# Altium PCB belt_control.PcbDoc
Units mm, origin at the board's own origin, x right, y up, seen from the top; angles counter-clockwise.
Board outline 112.19 x 75.23 mm, 2 copper layers (Top Layer, Bottom Layer); 118 components, 77 nets, 411 pads, 263 vias.
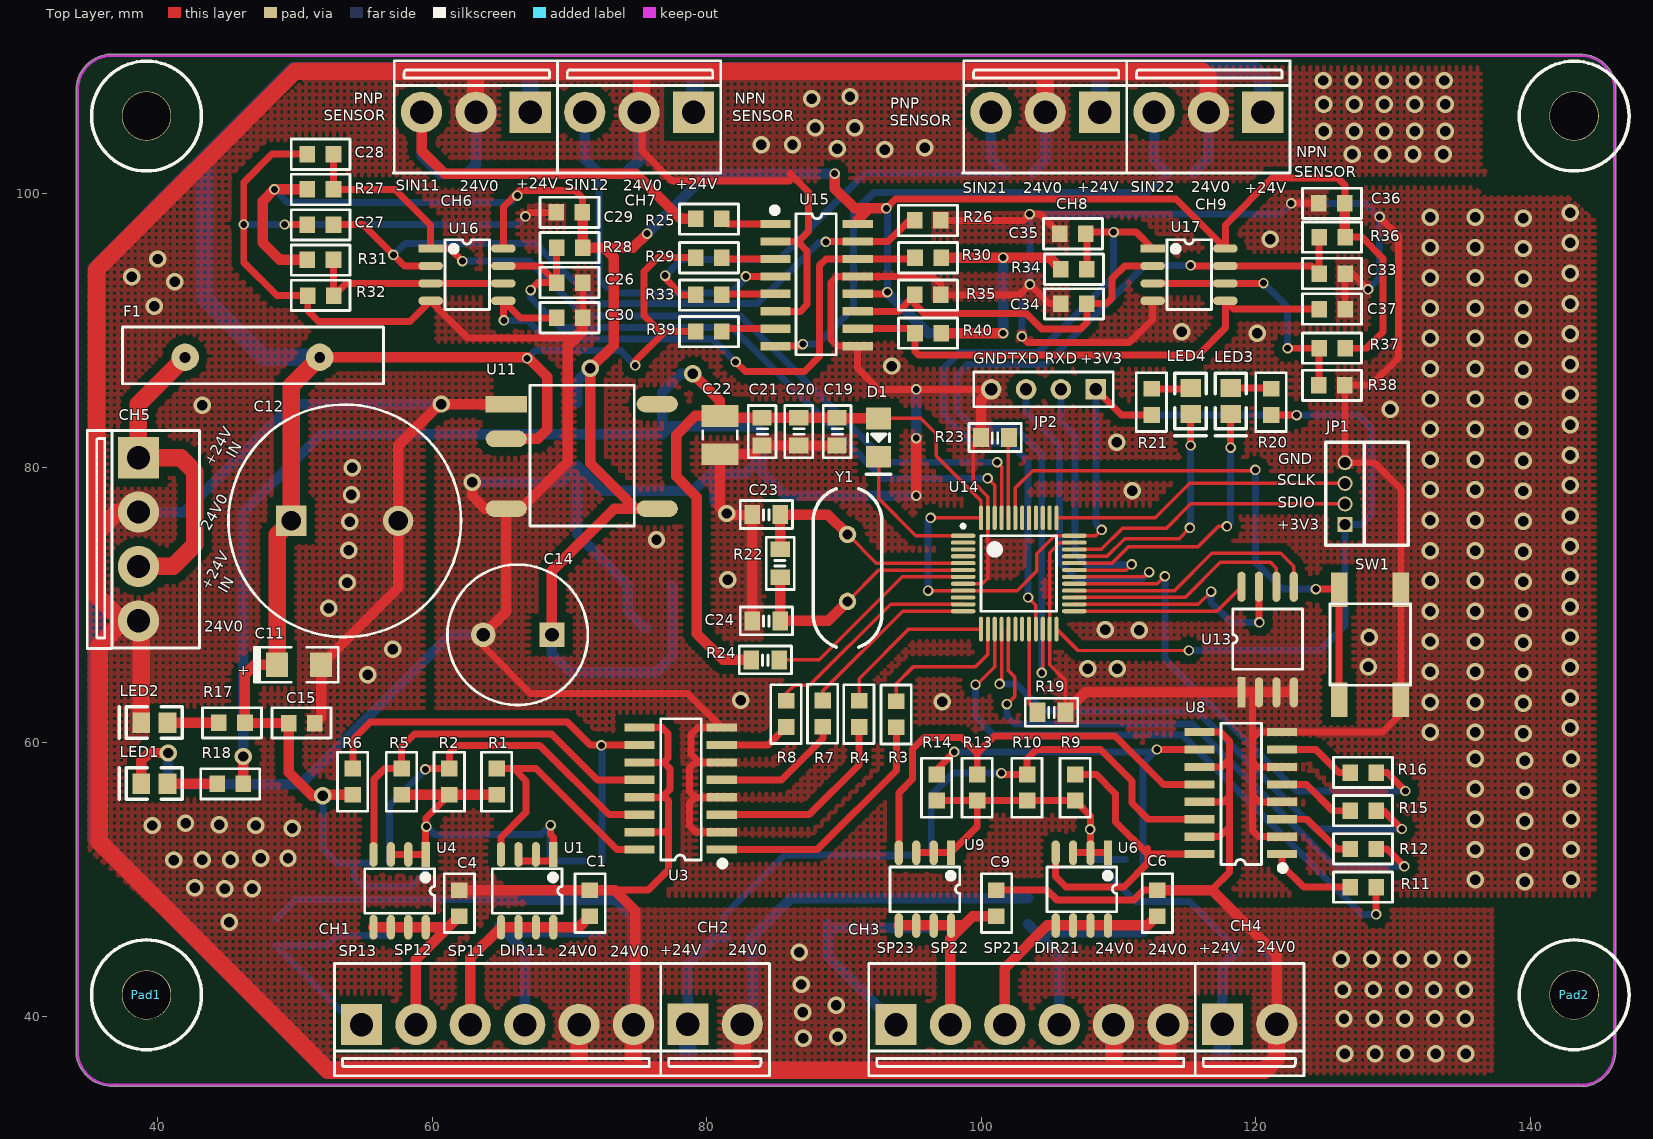
[diagram p0: Top Layer view]
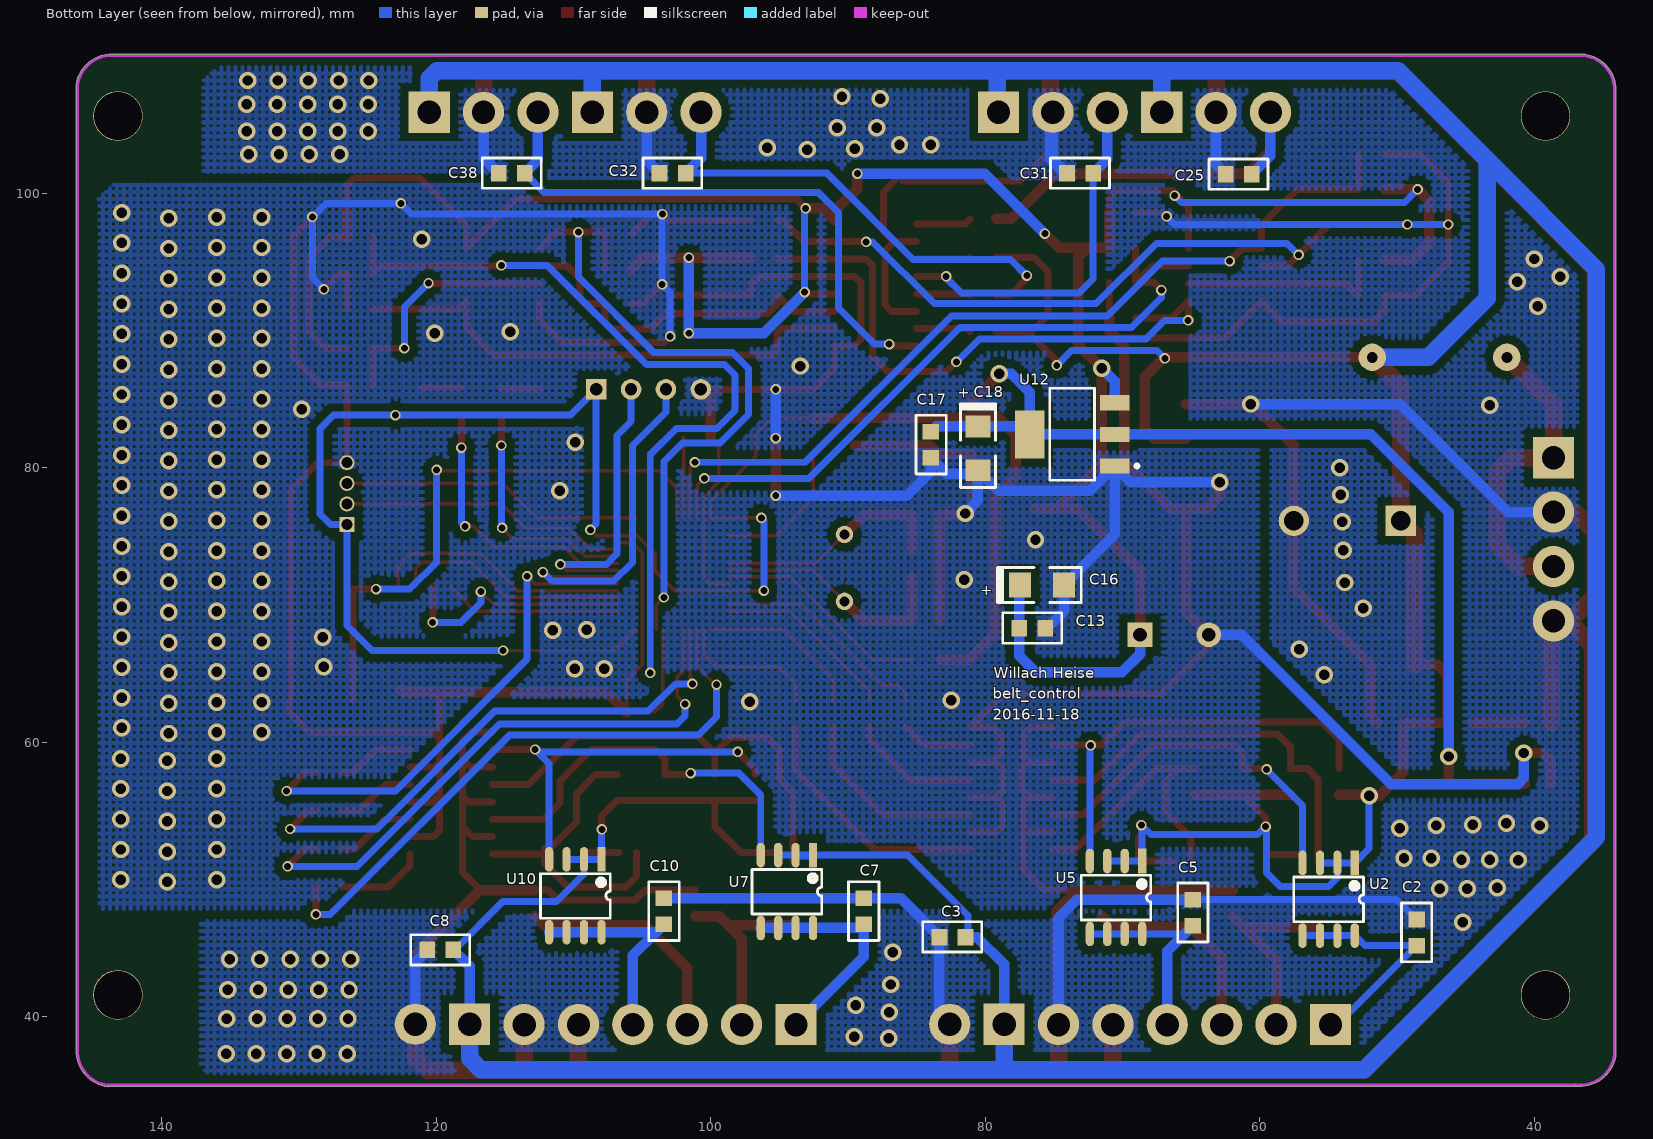
[diagram p1: Bottom Layer view, seen from below]

## Layer stack, top to bottom
Top Solder: solder mask 0.0102, Solder Resist, Dk 3.5
Top Layer: signal copper 0.0356
Dielectric 1: dielectric 0.32, FR-4, Dk 4.8
Bottom Layer: signal copper 0.0356
Bottom Solder: solder mask 0.0102, Solder Resist, Dk 3.5

## Board outline
34.057,37.1 cw(c34.138,37.16) 34.037,37.16 34.037,107.264 cw(c34.138,107.264) 34.047,107.308 cw(c36.678,107.493) 36.301,110.102 cw(c36.368,110.028) 36.368,110.128 143.293,110.128 cw(c143.293,110.028) 143.341,110.115 cw(c143.612,107.493) 146.226,107.836 cw(c146.126,107.823) 146.227,107.823 cw(c146.126,107.823) 146.227,107.823 146.227,37.389 cw(c146.126,37.389) 146.217,37.347 cw(c143.586,37.516) 143.929,34.902 cw(c143.916,35.001) 143.85,34.926 36.728,34.926 cw(c36.728,35.027) 36.7,34.93 cw(c36.652,37.567)

## Design rules (kind name [scope] priority, off if disabled: settings)
Clearance Clearance_1 [InPolygon] p1: gap=0.6
Clearance [All] p2: gap=0.152
ComponentClearance [All] p1: gap=0 collisioncheckmode=3 verticalgap=0 showdistances=FALSE
PolygonConnect [All] p1: connectstyle=Direct reliefconductorwidth=0.254 reliefentries=4 polygonreliefangle="90 Angle" airgapwidth=0.254
RoutingVias [All] p1: holewidth=0.711 width=1.27 viastyle="Through Hole" minholewidth=0.711 minwidth=1.27 maxholewidth=0.711 maxwidth=1.27
SolderMaskExpansion [All] p1: expansion=0.102
Width [All] p1: maxlimit=6 minlimit=0.254 preferedwidth=6
28 further rules are at their usual default settings.

## Classes and differential pairs
component class power_cpu: C11 C12 C13 C14 C15 C16 C17 C18 C19 C20 C21 C22 C23 C24 CH5 D1 F1 JP1 JP2 LED1 LED2 LED3 LED4 Pad2 R17 R18 R19 R20 R21 R22 R23 R24 SW1 U11 U12 U13 U14 Y1
component class senror_input: C25 C26 C27 C28 C29 C30 C31 C32 C33 C34 C35 C36 C37 C38 CH6 CH7 CH8 CH9 R25 R26 R27 R28 R29 R30 R31 R32 R33 R34 R35 R36 R37 R38 R39 R40 U15 U16 U17
component class belt_output: C1 C2 C3 C4 C5 C6 C7 C8 C9 C10 CH1 CH2 CH3 CH4 R1 R2 R3 R4 R5 R6 R7 R8 R9 R10 R11 R12 R13 R14 R15 R16 U1 U2 U3 U4 U5 U6 U7 U8 U9 U10

## Components (designator, comment, footprint, x,y, rotation, side; value= is the part's Value field where it differs from the comment)
C1 "Cap" 0805 71.476,48.26 r90 top
C2 "Cap" 0805 48.565,46.126 r90 bottom
C3 "Cap" 0805 82.372,45.796 r0 bottom
C4 "Cap" 0805 61.951,48.26 r90 top
C5 "Cap" 0805 64.872,47.574 r90 bottom
C6 "Cap" 0805 112.801,48.26 r90 top
C7 "Cap" 0805 88.849,47.676 r90 bottom
C8 "Cap" 0805 119.685,44.856 r0 bottom
C9 "Cap" 0805 101.092,48.26 r90 top
C10 "Cap" 0805 103.403,47.676 r90 bottom
C11 "Cap Pol3" "CAP A-3216" 50.292,65.634 r0 top
C12 "C_2200uF" C7.8*17 49.708,76.124 r0 top
C13 "Cap" 0805 76.556,68.301 r0 bottom
C14 "C_2200uF" C5*10 68.707,67.818 r180 top
C15 "Cap" 0805 50.47,61.392 r180 top
C16 "Cap Pol3" "CAP A-3216" 75.844,71.45 r180 bottom
C17 "Cap" 0805 83.947,81.661 r90 bottom
C18 "Cap Pol3" "CAP A-3216" 80.518,81.407 r270 bottom
C19 "Cap" C0805tan 89.484,82.626 r90 top
C20 "Cap" C0805tan 86.69,82.626 r90 top
C21 "Cap" C0805tan 84.023,82.626 r90 top
C22 "Cap Pol1" 3225[1210] 80.95,82.372 r270 top
C23 "Cap" C0805tan 84.328,76.581 r0 top
C24 "Cap" C0805tan 84.328,68.834 r0 top
C25 "Cap" 0805 61.519,101.371 r0 bottom
C26 "Cap" 0805 70.002,93.472 r180 top
C27 "Cap" 0805 51.841,97.701 r0 top
C28 "Cap" 0805 51.841,102.845 r0 top
C29 "Cap" 0805 69.977,98.603 r0 top
C30 "Cap" 0805 70.002,90.907 r180 top
C31 "Cap" 0805 73.076,101.448 r0 bottom
C32 "Cap" 0805 102.768,101.448 r0 bottom
C33 "Cap" 0805 125.552,94.132 r180 top
C34 "Cap" 0805 106.731,91.948 r0 top
C35 "Cap" 0805 106.655,97.053 r0 top
C36 "Cap" 0805 125.527,99.263 r0 top
C37 "Cap" 0805 125.552,91.542 r180 top
C38 "Cap" 0805 114.478,101.448 r0 bottom
CH1 "HEADER1X6" CH3.96-6PIN 54.839,39.446 r0 top locked
CH2 "HEADER1X2" CH3.96-2PIN 78.613,39.446 r0 top locked
CH3 "HEADER1X6" CH3.96-6PIN 93.777,39.446 r0 top locked
CH4 "HEADER1X2" CH3.96-2PIN 117.551,39.446 r0 top locked
CH5 "HEADER1X4" CH3.96-4PIN 38.583,80.721 r270 top
CH6 "HEADER1X3" CH3.96-3PIN 67.132,105.893 r180 top
CH7 "HEADER1X3" CH3.96-3PIN 79.019,105.893 r180 top
CH8 "HEADER1X3" CH3.96-3PIN 108.61,105.893 r180 top
CH9 "HEADER1X3" CH3.96-3PIN 120.498,105.893 r180 top
D1 "Diode 1N4148" LL34 92.507,83.591 r270 top
F1 "X30_UF500" X30UF600 41.986,88.062 r0 top
JP1 "4 HEADER" CON4_1.5 126.492,78.105 r90 top
JP2 "4 HEADER" HDR1X4 108.331,85.7 r180 top
LED1 "" LED-0805 40.691,56.972 r180 top
LED2 "" LED-0805 40.691,61.417 r180 top
LED3 "" LED-0805 118.161,85.81 r270 top
LED4 "" LED-0805 115.24,85.81 r270 top
Pad1 "Pad" pad35 39.141,41.589 r0 top
Pad2 "Pad" pad35 143.159,41.589 r0 top
Pad3 "Pad" pad35 143.159,105.613 r0 top locked
Pad4 "Pad" pad35 39.141,105.613 r0 top locked
R1 "Res2" 0805 64.694,57.125 r270 top
R2 "Res2" 0805 61.239,57.125 r270 top
R3 "Res2" 0805 93.802,62.027 r270 top
R4 "Res2" 0805 91.084,62.052 r270 top
R5 "Res2" 0805 57.76,57.125 r270 top
R6 "Res2" 0805 54.204,57.125 r270 top
R7 "Res2" 0805 88.443,62.078 r270 top
R8 "Res2" 0805 85.776,62.052 r270 top
R9 "Res2" 0805 106.832,56.693 r270 top
R10 "Res2" 0805 103.327,56.693 r270 top
R11 "Res2" 0805 127.813,49.428 r180 top
R12 "Res2" 0805 127.813,52.214 r180 top
R13 "Res2" 0805 99.695,56.693 r270 top
R14 "Res2" 0805 96.749,56.693 r270 top
R15 "Res2" 0805 127.813,54.999 r180 top
R16 "Res2" 0805 127.813,57.785 r180 top
R17 "Res2" 0805 45.39,61.417 r0 top
R18 "Res2" 0805 45.263,56.972 r0 top
R19 "Res2" C0805tan 105.105,62.179 r0 top
R20 "Res2" 0805 121.107,84.785 r270 top
R21 "Res2" 0805 112.395,84.785 r270 top
R22 "Res2" C0805tan 85.344,73.025 r270 top
R23 "Res2" C0805tan 100.99,82.194 r0 top
R24 "Res2" C0805tan 84.252,65.989 r0 top
R25 "Res2" 0805 80.137,98.12 r0 top
R26 "Res2" 0805 96.088,98.019 r0 top
R27 "Res2" 0805 51.841,100.273 r0 top
R28 "Res2" 0805 70.002,96.012 r180 top
R29 "Res2" 0805 80.137,95.301 r0 top
R30 "Res2" 0805 96.114,95.275 r180 top
R31 "Res2" 0805 51.841,95.129 r0 top
R32 "Res2" 0805 51.867,92.532 r180 top
R33 "Res2" 0805 80.137,92.583 r0 top
R34 "Res2" 0805 106.731,94.463 r0 top
R35 "Res2" 0805 96.088,92.583 r0 top
R36 "Res2" 0805 125.552,96.774 r180 top
R37 "Res2" 0805 125.552,88.697 r180 top
R38 "Res2" 0805 125.527,86.004 r0 top
R39 "Res2" 0805 80.137,89.916 r0 top
R40 "Res2" 0805 96.114,89.789 r180 top
SW1 "SW-KEY-2" KEY_SOP4 126.06,63.094 r90 top
U1 "CEM4435A" SOP8-OP27 68.809,51.765 r270 top
U2 "CEM4435A" SOP8-OP27 53.061,51.156 r270 bottom
U3 "TLP280-4" SO16 78.08,56.617 r180 top
U4 "CEM4435A" SOP8-OP27 59.512,51.765 r270 top
U5 "CEM4435A" SOP8-OP27 68.555,51.283 r270 bottom
U6 "CEM4435A" SOP8-OP27 109.22,51.892 r270 top
U7 "CEM4435A" SOP8-OP27 92.532,51.714 r270 bottom
U8 "TLP280-4" SO16 118.897,56.286 r180 top
U9 "CEM4435A" SOP8-OP27 97.79,51.892 r270 top
U10 "CEM4435A" SOP8-OP27 107.95,51.41 r270 bottom
U11 "B2405XT-2WR2" B2405XT-2WR2 65.38,84.633 r0 top
U12 "AMS1117-3.3" SOT223 73.66,82.423 r90 bottom
U13 "switch2X4" SOP8_switch 118.948,63.627 r90 top
U14 "STM32F103C8T6" LQFP48 102.718,72.288 r0 top
U15 "TLP280-4" SO16 87.986,93.294 r0 top
U16 "LM293" SOP8-OP27 59.919,95.961 r0 top
U17 "LM293" SOP8-OP27 112.522,95.961 r0 top
Y1 "8MHz" XTAL_US 90.246,75.133 r270 top

## Footprints (in the part's own frame and the unit in brackets; to place one, negate y for a bottom-side part, rotate by r counter-clockwise, add the part's x,y. Pads: shape width x height; smd on the part's side, far side on the other; paste and mask are expansions set on the pad)
0805 [mm] "1.14mm,1.2mm,3.05mm"
  rect 1.14x1.2 smd: 1(-0.95,0) 2(0.95,0)
  silkscreen extent -2.13,-1.12 2.16,1.09
3225[1210] [mm] "Chip Resistor; Body 3.2 x 2.5 mm (LxW typ)"
  rect 1.6x2.7 smd: 1(-1.4,0) 2(1.4,0)
  silkscreen extent -0.3,-1.25 0.3,1.25
B2405XT-2WR2 [mm]
  rect 3x1.2 smd: 1(0,0)
  oval 3x1.2 smd: 2(0,-2.54) 4(0,-7.62) 5(11,-7.62) 8(11,0)
  silkscreen extent 1.73,-8.89 9.32,1.37
C5*10 [mm]
  rect 1.8x1.8 hole 1: 1(0,0)
  round 1.8 hole 1: 2(5,0)
  silkscreen extent -2.62,-5.11 7.62,5.11
C7.8*17 [mm]
  rect 2.2x2.2 hole 1.4: 1(0,0)
  round 2.2 hole 1.4: 2(7.8,0)
  silkscreen extent -4.57,-8.47 12.37,8.47
C0805tan [mil]
  rect 45x55 smd: 1(-40,0) 2(40,0)
  silkscreen extent -75,-40 75,40
"CAP A-3216" [mm]
  rect 1.6x1.8 smd: 1(-1.6,0) 2(1.6,0)
  silkscreen extent -3.25,-1.27 2.85,1.27
CH3.96-2PIN [mm]
  rect 3x3 hole 1.7: 1(0,0)
  round 3 hole 1.7: 2(3.96,0)
  silkscreen extent -1.98,-3.76 5.94,4.42
CH3.96-3PIN [mm]
  rect 3x3 hole 1.7: 1(0,0)
  round 3 hole 1.7: 2(3.96,0) 3(7.92,0)
  silkscreen extent -1.98,-3.76 9.98,4.42
CH3.96-4PIN [mm]
  rect 3x3 hole 1.7: 1(0,0)
  round 3 hole 1.7: 2(3.96,0) 3(7.92,0) 4(11.887,0)
  silkscreen extent -1.98,-3.73 13.89,4.45
CH3.96-6PIN [mm]
  rect 3x3 hole 1.7: 1(0,-0.025)
  round 3 hole 1.7: 2(3.96,-0.025) 3(7.92,-0.025) 4(11.887,-0.025) 5(15.847,-0.025) 6(19.807,-0.025)
  silkscreen extent -1.98,-3.76 21.79,4.42
CON4_1.5 [mm]
  rect 1.1x1.1 hole 0.8: 1(-2.25,0)
  round 1.1 hole 0.8: 2(-0.75,0) 3(0.75,0) 4(2.25,0)
  silkscreen extent -3.75,-4.6 3.75,1.4
HDR1X4 [mm] "Connector; Header; 4 Position"
  rect 1.5x1.5 hole 0.9: 1(0,0)
  round 1.5 hole 0.9: 2(2.54,0) 3(5.08,0) 4(7.62,0)
  silkscreen extent -1.27,-1.27 8.89,1.27
KEY_SOP4 [mm]
  rect 2.5x1.2 smd: 1(0,0) 1(8,0) 2(0,-4.5) 2(8,-4.5)
  silkscreen extent 1.04,-5.21 6.98,0.66
LED-0805 [mm]
  rect 1.3x1.5 smd: 1(0,0) 2(1.9,0)
  silkscreen extent -1.08,-1.14 3.49,1.14
LL34 [mm]
  rect 1.6x1.8 smd: 1(0,0) 2(2.8,0)
  silkscreen extent 1.1,-0.89 4.07,0.89
LQFP48 [mm]
  oval 1.8x0.3 smd: 1(-4.05,2.75) 2(-4.05,2.25) 3(-4.05,1.75) 4(-4.05,1.25) 5(-4.05,0.75) 6(-4.05,0.25) 7(-4.05,-0.25) 8(-4.05,-0.75) 9(-4.05,-1.25) 10(-4.05,-1.75) 11(-4.05,-2.25) 12(-4.05,-2.75) 25(4.05,-2.75) 26(4.05,-2.25) 27(4.05,-1.75) 28(4.05,-1.25) 29(4.05,-0.75) 30(4.05,-0.25) 31(4.05,0.25) 32(4.05,0.75) 33(4.05,1.25) 34(4.05,1.75) 35(4.05,2.25) 36(4.05,2.75)
  oval 0.3x1.8 smd: 13(-2.75,-4.05) 14(-2.25,-4.05) 15(-1.75,-4.05) 16(-1.25,-4.05) 17(-0.75,-4.05) 18(-0.25,-4.05) 19(0.25,-4.05) 20(0.75,-4.05) 21(1.25,-4.05) 22(1.75,-4.05) 23(2.25,-4.05) 24(2.75,-4.05) 37(2.75,4.05) 38(2.25,4.05) 39(1.75,4.05) 40(1.25,4.05) 41(0.75,4.05) 42(0.25,4.05) 43(-0.25,4.05) 44(-0.75,4.05) 45(-1.25,4.05) 46(-1.75,4.05) 47(-2.25,4.05) 48(-2.75,4.05)
  silkscreen extent -4.17,-2.75 2.75,3.57, body extent -3.5,-3.5 3.5,3.5, height 1.6
pad35 [mm]
  round 3.6 hole 3.5: 1(0.025,0)
  silkscreen extent -3.97,-4 4.03,4
SO16 [mm] "Wide = 6mm"
  rect 2.2x0.6 smd: 1(-3,4.445) 2(-3,3.175) 3(-3,1.905) 4(-3,0.635) 5(-3,-0.635) 6(-3,-1.905) 7(-3,-3.175) 8(-3,-4.445) 9(3,-4.445) 10(3,-3.175) 11(3,-1.905) 12(3,-0.635) 13(3,0.635) 14(3,1.905) 15(3,3.175) 16(3,4.445)
  silkscreen extent -3.23,-5.08 1.45,5.64
SOP8-OP27 [mm]
  rect 1.8x0.6 smd: 1(-0.051,0)
  oval 1.8x0.6 smd: 2(-0.051,-1.27) 3(-0.051,-2.54) 4(-0.051,-3.81) 5(5.251,-3.81) 6(5.251,-2.54) 7(5.251,-1.27) 8(5.251,0)
  silkscreen extent 0.99,-4.44 4.24,0.64
SOP8_switch [mm]
  rect 2.2x0.6 smd: 1(0,0)
  oval 2.2x0.6 smd: 2(0,-1.27) 3(0,-2.54) 4(0,-3.81) 5(7.695,-3.81) 6(7.695,-2.54) 7(7.695,-1.27) 8(7.695,0)
  silkscreen extent 1.68,-4.44 6.06,0.64
SOT223 [mm] "SOT-223/SC-73; 4 Leads; Body 6.7 x 7.3 mm, inc. leads (LxW max)"
  rect 1.1x2.15 smd: 1(-2.3,-3.1) 2(0,-3.1) 3(2.3,-3.1)
  rect 3.5x2.15 smd: 4(0,3.1)
  silkscreen extent -3.35,-4.85 3.35,1.63
X30UF600 [mm]
  round 2 hole 0.8: 1(0,-0.025) 2(9.804,-0.025)
  silkscreen extent -4.57,-1.96 14.45,2.18
XTAL_US [mil]
  round 50 hole 28: 1(0,0) 2(192.13,0)
  silkscreen extent -131,-98 323,98

## Part data
C1 C2 C3 C4 C5 C6 C7 C8 C9 C10 C13 C15 C17 C19 C20 C21 C23 C24 C25 C26 C27 C28 C29 C30 C31 C32 C33 C34 C35 C36 C37 C38: "Capacitor"
C11 C16 C18: "Polarized Capacitor (Surface Mount)"
C22: "Polarized Capacitor (Radial)"
D1: "High Conductance Fast Diode"
F1: library part "Fuse 1", "Fuse"
JP1 JP2: "4 Pin Header"
LED1 LED2 LED3 LED4: library part LED2, "Typical RED, GREEN, YELLOW, AMBER GaAs LED"
R1 R2 R3 R4 R5 R6 R7 R8 R9 R10 R11 R12 R13 R14 R15 R16 R17 R18 R19 R20 R21 R22 R23 R24 R25 R26 R27 R28 R29 R30 R31 R32 R33 R34 R35 R36 R37 R38 R39 R40: "Resistor"
U3 U8 U15: library part TLP521-4
U12: library part AMS1117-5
Y1: library part XTAL, "Crystal Oscillator"

## Via types
v1: diameter 1.27, hole 0.762, Top Layer to Bottom Layer, 193 vias
v2: diameter 0.762, hole 0.508, Top Layer to Bottom Layer, 70 vias

## Nets (pads, with @x,y where several pads share a name; then routed paths per layer and width w, separated by ;. In a path a pad name is that pad's centre, name@x,y a point inside that pad or via, vN(x,y) a via of type N, cw(c..) or ccw(c..) an arc to the next point about the centre after c; other vN are vias at no path point)
24V0: C1.2 C2.2 C3.2 C4.2 C5.2 C6.2 C7.2 C8.2 C9.2 C10.2 C11.2 C12.2 C15.1 C25.2 C31.2 C32.2 C38.2 CH1.5 CH1.6 CH2.2 CH3.5 CH3.6 CH4.2 CH5.2 CH5.4 CH6.2 CH7.2 CH8.2 CH9.2 LED2.2 U3.9 U3.11 U3.13 U3.15 U8.9 U8.11 U8.13 U8.15 U11.1 U15.2 U15.6 | length 552.9
  Top Layer w0.508: 73.279,49.21 75.702,49.21 77.216,50.724 77.216,55.702 76.937,55.982 76.733,55.982 ; U3.15 76.937,53.442 77.191,53.696 ; U3.13 76.733,55.982 ; U3.11 76.835,58.522 ; U3.9 76.733,61.062 77.165,60.63 77.165,58.852 76.835,58.522 ; CH7.2@75.263,105.893 75.263,103.096 77.47,100.889 86.03,100.889 ; U15.6 86.817,91.389 87.3,91.872 87.3,95.783 86.614,96.469 ; U15.2 86.614,96.469 ; 86.055,101.422 87.401,100.076 87.401,97.206 86.665,96.469 86.614,96.469 ; C9.2 104.79,49.21 105.486,48.514 111.1,48.514 111.796,49.21 C6.2 ; U8.15 117.348,53.111 118.059,53.823 ; U8.13 117.627,55.651 118.059,56.083 ; U8.11 117.475,58.191 118.059,58.776 ; U8.9 117.399,60.731 118.059,60.071 118.059,58.776 ; 116.464,49.266 116.804,49.266 118.059,50.521 118.059,53.823 ; 76.733,55.982 77.292,56.54 77.292,58.09 76.86,58.522 76.835,58.522 ; 118.059,53.823 118.059,56.083 ; 118.059,56.083 118.059,58.776
  Top Layer w0.762: C15.1 51.892,61.864 C11.2 57.508,71.249 C12.2 57.508,81.612 60.528,84.633 v1(60.655,84.633) U11.1 ; C4.2 C1.2 73.279,49.21 74.773,47.716 74.773,36.754 ; C6.2 116.804,49.21 121.511,44.503 CH4.2
  Top Layer w1.27: CH5.2 37.01,76.761 35.535,75.286 ; LED2.2 38.791,68.626 CH5.4 CH5.4@37.516,68.834 ; CH6.2 63.172,108.714 ; CH1.5 70.686,36.096 70.688,36.093 ; CH1.6 74.646,36.241 74.498,36.093 ; CH7.2@75.263,105.893 75.263,108.765 75.387,108.89 ; CH2.2 82.573,36.167 82.499,36.093 ; CH8.2 104.65,108.887 104.648,108.89 ; CH3.5 109.624,36.193 109.525,36.093 ; CH3.6 113.584,36.139 113.538,36.093 ; CH9.2 116.538,108.456 116.103,108.89 104.648,108.89 ; CH4.2 121.511,36.98 120.625,36.093 113.538,36.093 ; 35.535,75.286 35.535,94.437 49.987,108.89 75.387,108.89 ; 35.535,75.286 35.535,70.714 37.414,68.834 CH5.4@37.516,68.834 ; CH5.4@37.516,68.834 35.712,67.031 35.712,52.756 52.375,36.093 70.688,36.093 ; 70.688,36.093 74.498,36.093 ; 74.498,36.093 82.499,36.093 ; 75.387,108.89 104.648,108.89 ; 82.499,36.093 109.525,36.093 ; 109.525,36.093 113.538,36.093
  Bottom Layer w0.508: C2.2 50.013,48.524 C5.2
  Bottom Layer w0.762: CH5.2 41.887,76.761 49.759,84.633 v1(60.655,84.633) ; C25.2 63.172,102.075 ; C5.2 73.33,48.524 74.646,47.208 CH1.6 ; C31.2@74.026,101.27 75.263,102.507 75.263,102.532 ; CH7.2 75.059,102.481 C31.2 74.178,101.448 75.263,102.532 ; CH7.2@75.263,105.893 75.263,102.532 ; CH2.2 83.322,40.195 C3.2 86.152,48.626 89.484,48.626 C10.2 ; C3.2@83.144,45.654 86.04,48.55 ; C32.2 104.65,102.38 CH8.2 ; C38.2 116.538,102.557 CH9.2 ; C8.2 121.511,43.98 CH4.2 ; 63.172,102.075 63.198,102.1 63.198,105.867 CH6.2 63.172,102.075
  other v1: 126.467,37.287 128.675,37.287 130.883,37.287 133.092,37.287 135.3,37.287 87.02,38.43 89.535,38.532 126.416,39.853 128.624,39.853 130.832,39.853 133.041,39.853 135.249,39.853 86.995,40.31 89.433,40.818 126.34,41.961 128.548,41.961 130.756,41.961 132.965,41.961 135.173,41.961 86.868,42.342 126.213,44.196 128.421,44.196 130.629,44.196 132.838,44.196 135.046,44.196 86.716,44.704 45.212,46.863 44.882,49.327 46.863,49.327 42.672,49.403 41.148,51.41 43.231,51.435 45.288,51.435 47.498,51.537 49.479,51.537 49.784,53.721 39.599,53.924 47.117,53.924 44.475,53.975 42.012,54.077 55.296,64.897 57.125,66.777 52.451,69.748 53.797,71.628 53.899,73.99 53.975,76.048 54.102,78.029 54.153,79.985 43.231,84.557 39.726,91.77 41.224,93.548 38.1,93.904 39.98,95.199 127.025,102.845 129.234,102.845 131.442,102.845 133.65,102.845 92.964,103.175 89.484,103.226 95.885,103.302 83.972,103.53 86.233,103.53 124.943,104.521 127.151,104.521 129.359,104.521 131.568,104.521 133.776,104.521 87.884,104.75 90.78,104.75 124.943,106.477 127.151,106.477 129.359,106.477 131.568,106.477 133.776,106.477 87.63,106.883 90.424,107.036 124.892,108.204 127.1,108.204 129.308,108.204 131.517,108.204 133.725,108.204
+3.3V: C17.2 C18.1 C19.2 C20.2 C21.2 C22.1 D1.1 JP1.1 JP2.1 R18.2 R20.2 R21.2 R24.1 U12.2 U12.4 U14.9 U14.24 U14.36 U14.48 | length 218.5
  Top Layer w0.254: D1.1 95.58,83.591 96.698,82.474 96.698,80.848 99.968,77.578 U14.48 v2(96.305,76.338) v2@96.266,76.378 ; v2@96.114,71.044 v2(96.119,71.038) U14.9 102.611,71.038 104.038,72.466 104.038,73.736 105.341,75.038 U14.36 108.312,75.038 108.763,75.489 v2(108.763,75.463) ; U14.24 107.031,66.675 v2(115.113,66.675) v2@115.138,66.65
  Top Layer w0.508: JP2.1 110.195,83.835 R21.2 ; R20.2 121.122,83.82 v2(122.961,83.82)
  Top Layer w0.762: R18.2 46.213,58.938 v1(46.228,58.953) ; v1(78.969,86.843) 80.95,84.861 C22.1 ; R24.1 81.178,65.989 79.273,67.894 79.273,77.851 77.749,79.375 77.749,82.372 79.149,83.772 C22.1 ; D1.1 89.535,83.591 C19.2 C20.2 C21.2 81.08,83.642 C22.1
  Bottom Layer w0.508: v2(96.119,71.038) 96.119,76.152 v2(96.305,76.338) ; v2(108.763,75.463) 108.331,75.895 JP2.1 110.211,83.82 v2(122.961,83.82) 127.457,83.82 128.448,82.829 128.448,76.606 127.696,75.855 JP1.1 126.492,68.504 124.663,66.675 v2(115.113,66.675)
  Bottom Layer w0.762: v1(46.228,58.953) 46.228,76.759 51.892,82.423 U12.2 U12.4 ; v1(78.969,86.843) 78.105,86.843 76.76,85.498 U12.4 ; C17.2 83.551,83.007 C18.1 77.344,83.007 U12.4
+5V: C13.2 C14.1 C16.1 C29.2 C36.2 R27.1 R28.1 R30.1 R31.1 R34.1 R36.1 R37.1 R40.1 U11.5 U12.3 U15.12 U15.16 U16.8 U17.8 | length 215.6
  Top Layer w0.508: U16.8 65.169,99.002 66.345,100.178 70.383,100.178 70.927,99.634 C29.2 ; U15.12 93.015,92.659 v2(93.142,92.786) ; v2(93.066,98.882) 93.751,99.568 114.166,99.568 U17.8 117.773,97.681 121.183,101.092 125.959,101.092 126.477,100.574 C36.2 ; R36.1@126.477,96.799 127.711,96.799 129.261,95.25 129.261,89.891 128.067,88.697 R37.1
  Top Layer w0.762: R31.1 48.863,95.129 47.625,96.368 47.625,99.416 v2(48.482,100.273) R27.1 ; C14.1 68.707,72.466 73.254,77.013 74.803,77.013 ; C29.2 70.952,98.577 R28.1 72.517,96.012 ; v2(75.641,97.053) 74.6,96.012 72.517,96.012 ; U11.5 74.803,77.013 ; v2(89.306,101.422) 89.306,100.33 90.754,98.882 91.824,98.882 ; 90.986,98.044 91.824,98.882 ; v2(93.066,98.882) 91.824,98.882 ; R40.1 v2(101.575,89.789) ; R30.1 104.968,95.275 R34.1 ; R36.1@126.477,96.799 C36.2 ; 72.517,96.012 73.203,95.326 73.203,88.925 v1(71.501,87.224) 71.501,80.315 74.803,77.013
  Bottom Layer w0.508: v2(48.482,100.273) 49.441,99.314 65.684,99.314 v2(66.192,99.822) ; v2(93.066,98.882) 93.066,98.933 93.142,98.857 v2(93.142,92.786)
  Bottom Layer w0.762: C14.1 68.707,66.421 70.028,65.1 76.327,65.1 77.506,66.279 C13.2 77.506,71.389 C16.1 ; U12.3 70.56,86.283 v1(71.501,87.224) ; v2(75.641,97.053) 80.01,101.422 v2(89.306,101.422) ; v2(93.142,92.786) 96.139,89.789 v2(101.575,89.789) v2(101.575,95.301)
+24V: C3.1 C8.1 C11.1 C12.1 C15.2 CH2.1 CH4.1 CH6.1 CH7.1 CH8.1 CH9.1 F1.2 R1.2 R2.2 R5.2 R6.2 R9.2 R10.2 R13.2 R14.2 R17.2 R29.1 R39.1 U1.1 U1.2 U1.3 U2.1 U2.2 U2.3 U4.1 U4.2 U4.3 U5.1 U5.2 U5.3 U6.1 U6.2 U6.3 U7.1 U7.2 U7.3 U9.1 U9.2 U9.3 U10.1 U10.2 U10.3 U11.2 | length 476
  Top Layer w0.508: U4.3 U4.2 U4.1 v2@59.512,53.823 ; v2@59.538,53.848 59.538,54.473 R2.2 ; U1.3@66.269,51.333 68.809,51.333 U1.1 68.809,53.061 68.605,53.264 v2(68.605,53.95) ; v2(74.778,87.452) 74.778,87.757 76.937,89.916 ; R39.1 76.581,89.916 75.413,91.084 75.413,94.285 76.429,95.301 R29.1 ; U9.3 U9.2 U9.1 99.695,53.848 R13.2 ; R14.2 R13.2 ; U6.3 U6.2 ; U6.1 U6.2 ; R13.2 R10.2 R9.2 107.95,54.625 U6.2
  Top Layer w0.762: C11.1 47.066,65.634 46.34,64.907 R17.2 46.365,61.392 C15.2 49.52,57.821 51.232,56.109 v1(52.019,56.109) 52.085,56.175 R6.2 ; F1.2 66.929,88.036 68.351,86.614 68.351,82.779 67.666,82.093 U11.2 ; R5.2 R2.2 R1.2
  Top Layer w1.27: C11.1 48.692,75.108 C12.1 49.708,85.954 F1.2
  Bottom Layer w0.508: v1(52.019,56.109) 52.019,52.248 U2.1 U2.2 ; U2.3 U2.2 ; v2(66.904,87.96) 67.462,88.519 73.711,88.519 v2(74.778,87.452) ; v2(68.605,53.95) v2@68.555,53.899 ; U5.3 U5.2 U5.1 v2@68.555,53.899 ; C3.1@81.244,45.796 81.244,47.361 85.649,51.765 U7.1 U7.2 U7.3 ; U7.1@92.532,51.714 U7.2@93.802,51.714 ; v2(107.925,53.645) 107.95,53.619 U10.1 U10.2 ; U10.3 U10.2 ; C8.1@118.633,44.892 115.138,48.387 111.227,48.387 109.22,50.394 U10.2 ; U2.2 54.331,50.14 54.991,49.479 58.496,49.479 59.512,50.495 59.512,53.797 v2(59.563,53.848) 60.147,53.264 67.92,53.264 v2@68.555,53.899
  Bottom Layer w0.762: CH2.1 78.613,43.815 80.594,45.796 81.244,45.796 C3.1 ; CH4.1 117.551,43.673 C8.1
  Bottom Layer w1.27: F1.2 47.727,88.036 43.409,92.354 43.409,102.413 ; CH6.1 67.132,108.839 ; CH2.1 78.613,36.246 78.511,36.144 ; CH7.1 79.121,105.994 79.121,108.915 ; CH8.1 108.61,108.915 ; CH4.1 117.551,36.957 116.738,36.144 78.511,36.144 ; CH9.1 120.498,108.356 119.939,108.915 108.61,108.915 ; 43.409,102.413 35.458,94.463 35.458,53.061 52.375,36.144 78.511,36.144 ; 43.409,102.413 49.911,108.915 79.121,108.915 ; 79.121,108.915 108.61,108.915
+24V_IN: CH5.1 CH5.3 F1.1 | length 23.3
  Top Layer w1.27: CH5.3 41.102,72.801 42.672,74.371 42.672,79.705 41.656,80.721 CH5.1 38.583,84.633 F1.1
DIR11: C5.1 CH1.4 U5.5 U5.6 U5.7 U5.8 | length 14.9
  Bottom Layer w0.508: 65.464,46.032 U5.8 U5.7 U5.6 U5.5
  Bottom Layer w0.762: C5.1 65.464,46.032 66.726,44.77 CH1.4
DIR21: C10.1 CH3.4 U10.5 U10.6 U10.7 U10.8 | length 16
  Bottom Layer w0.762: C10.1 C10.1@103.97,46.159 ; CH3.4 105.664,44.465 C10.1@103.97,46.159 ; U10.5 U10.6 U10.7 U10.8 C10.1@103.97,46.159
GND: C13.1 C14.2 C16.2 C17.1 C18.2 C19.1 C20.1 C21.1 C22.2 C23.1 C24.1 C26.1 C27.1 C28.1 C29.1 C30.1 C33.1 C34.1 C35.1 C36.1 C37.1 JP1.4 JP2.4 LED1.2 R19.2 R23.1 R26.2 R32.2 R35.2 R38.2 SW1.2 U3.2 U3.4 U3.6 U3.8 U8.2 U8.4 U8.6 U8.8 U11.4 U12.1 U13.1 U13.2 U13.3 U13.4 U14.8 U14.23 U14.35 U14.47 U15.9 U15.13 U16.4 U17.4 | length 477.5
  Top Layer w0.254: U14.8 100.063,71.538 100.468,71.943 U14.47 100.468,77.891 99.39,78.969 99.39,81.61 R23.1 ; R19.2 106.121,64.491 104.968,65.644 U14.23 104.968,73.802 105.704,74.538 U14.35
  Top Layer w0.508: v2(49.225,97.714) 49.238,97.701 C27.1 ; C28.1 48.311,102.845 46.253,100.787 v2(46.253,97.714) 46.253,94.945 48.666,92.532 R32.2 50.917,91.45 51.714,90.653 58.369,90.653 U16.4 62.56,89.459 70.46,89.459 ; C14.2 63.707,67.001 67.158,63.551 78.59,63.551 U3.8 79.35,61.062 ; v2(66.777,98.298) 67.081,98.603 C29.1 ; C30.1 C26.1 ; 79.324,61.062 79.35,61.062 ; U3.2 79.197,53.442 78.715,53.924 78.715,55.55 79.146,55.982 ; U3.4 79.146,55.982 ; U3.6 79.451,58.522 ; R26.2 103.048,98.019 v2(103.505,98.476) 104.282,98.476 C35.1 ; JP2.4 92.507,85.7 90.986,87.221 U15.9 89.535,88.849 89.052,89.332 89.052,93.472 89.51,93.929 U15.13 96.444,93.929 97.038,93.335 R35.2 102.768,92.583 v2(103.53,93.345) 104.927,91.948 C34.1 ; v2(102.946,89.56) 102.946,89.51 103.353,89.103 110.769,89.103 112.471,90.805 U17.4 ; U13.2 119.736,63.144 119.736,60.249 ; U8.2 120.193,53.111 119.736,53.569 119.736,56.159 ; U8.4 120.244,55.651 119.736,56.159 ; U8.6 120.117,58.191 119.736,58.572 ; v2@122.555,99.238 v2(122.568,99.251) 122.58,99.263 C36.1 ; C37.1 C33.1 127.025,94.132 v2(128.168,92.989) ; v2(129.007,98.273) 130.378,96.901 130.378,87.986 128.397,86.004 R38.2 126.477,80.37 JP1.4 128.636,80.355 130.56,78.431 130.56,71.094 SW1.2@130.56,63.094 ; SW1.2@130.687,62.967 130.687,62.205 129.214,60.731 U8.8 120.218,60.731 119.736,60.249 ; 79.146,55.982 78.74,56.388 78.74,58.115 79.146,58.522 79.451,58.522 ; 79.35,61.062 78.842,60.554 78.842,59.131 79.451,58.522 ; 119.736,56.159 119.736,58.572 ; 119.736,58.572 119.736,60.249
  Top Layer w0.762: LED1.2 38.791,58.628 39.37,59.207 v1(40.742,59.207) ; v1(62.89,78.943) 62.89,77.953 63.83,77.013 U11.4 ; C14.2 65.38,69.491 U11.4 ; C30.1 70.952,89.952 70.46,89.459 69.875,88.875 69.875,80.442 66.446,77.013 U11.4 ; v1@80.95,77.064 C22.2 83.385,80.972 C21.1 C20.1 C19.1 ; v1@81.432,76.581 C23.1 C24.1 ; v2(95.25,77.953) v2(95.25,82.144) ; R23.1 99.974,84.963 JP2.4 ; R19.2 107.569,63.627 U13.1 U13.2 U13.3 122.352,63.627 U13.4@122.555,63.83
  Bottom Layer w0.508: v2(46.253,97.714) v2(49.225,97.714) 66.192,97.714 v2(66.777,98.298) ; v2(102.946,89.56) 102.946,92.761 v2(103.53,93.345) 103.53,98.45 v2(103.505,98.476) 121.793,98.476 v2(122.568,99.251) 128.029,99.251 v2(129.007,98.273) 129.007,93.828 v2(128.168,92.989)
  Bottom Layer w0.762: v1(40.742,59.207) 40.742,57.404 41.199,56.947 50.419,56.947 61.29,67.818 C14.2 ; v1(62.89,78.943) 69.38,78.943 U12.1 ; C13.1 75.489,68.301 74.244,69.545 C16.2 70.56,75.135 U12.1 ; v1(81.432,76.657) 80.518,77.572 C18.2 ; v2@95.199,85.75 v2(95.25,85.7) v2(95.25,82.144) ; v2(95.25,77.953) 85.7,77.953 83.947,79.705 C17.1 82.789,79.553 80.772,79.553 C18.2 ; U12.1 72.375,78.308 79.019,78.308 C18.2
  other v1: 139.598,49.815 135.992,49.968 142.977,49.968 139.598,52.024 135.992,52.176 142.977,52.176 139.598,54.232 135.992,54.384 142.977,54.384 139.598,56.44 135.992,56.593 142.977,56.593 139.598,58.649 135.992,58.801 142.977,58.801 139.471,60.63 132.69,60.706 135.992,60.706 142.9,61.036 139.471,62.838 132.69,62.914 135.992,62.914 97.155,62.941 82.474,63.043 142.9,63.245 139.471,65.046 132.69,65.123 135.992,65.123 107.747,65.354 109.88,65.354 142.9,65.453 128.194,65.481 139.471,67.255 132.69,67.331 135.992,67.331 128.245,67.64 142.9,67.661 111.506,68.148 109.017,68.199 139.471,69.463 132.69,69.539 135.992,69.539 142.9,69.869 139.471,71.671 132.69,71.748 135.992,71.748 81.509,71.831 142.9,72.078 139.471,73.88 132.69,73.956 135.992,73.956 142.9,74.286 76.327,74.752 139.471,76.088 132.69,76.164 135.992,76.164 142.9,76.494 110.998,78.308 139.471,78.296 132.69,78.372 135.992,78.372 142.9,78.703 139.471,80.505 132.69,80.581 135.992,80.581 142.9,80.911 109.855,81.839 139.471,82.713 132.69,82.789 135.992,82.789 142.9,83.119 129.794,84.252 139.471,84.921 132.69,84.997 135.992,84.997 142.9,85.328 139.471,87.129 132.69,87.206 135.992,87.206 93.472,87.401 142.9,87.536 139.471,89.338 132.69,89.414 135.992,89.414 142.9,89.744 120.091,89.789 114.579,89.891 139.471,91.546 132.69,91.622 135.992,91.622 142.9,91.952 139.471,93.754 132.69,93.831 135.992,93.831 142.9,94.161 139.471,95.963 132.69,96.039 135.992,96.039 142.9,96.369 121.056,96.647 139.471,98.171 132.69,98.247 135.992,98.247 142.9,98.577
KEY1: SW1.1 U14.43 | length 41.9
  Top Layer w0.254: U14.43 102.468,78.515 103.734,79.781 119.913,79.781 v2(119.964,79.832)
  Top Layer w0.508: v2(124.358,71.145) 126.008,71.145 126.06,71.094 SW1.1@126.06,63.094
  Bottom Layer w0.508: v2(119.964,79.832) 119.964,73.101 121.92,71.145 v2(124.358,71.145)
LED1: LED3.2 U14.32 | length 20.5
  Top Layer w0.254: U14.32 109.513,73.038 110.693,74.219 115.773,74.219 117.272,75.717 v2(117.881,75.717)
  Top Layer w0.508: v2(118.161,81.458) LED3.2
  Bottom Layer w0.508: v2(117.881,75.717) 118.161,75.997 v2(118.161,81.458)
LED2: LED4.2 U14.33 | length 17.6
  Top Layer w0.254: U14.33 109.149,73.538 110.439,74.828 114.402,74.828 v2(115.189,75.616)
  Top Layer w0.508: v2(115.24,81.61) LED4.2
  Bottom Layer w0.508: v2(115.189,75.616) 115.24,75.667 v2(115.24,81.61)
NetC23_2: C23.2 R22.1 U14.5 Y1.1 | length 17.5
  Top Layer w0.254: Y1.1 92.341,73.038 U14.5
  Top Layer w0.762: R22.1 C23.2 88.798,76.581 Y1.1 ; Y1.1@90.17,75.057 Y1.1@90.297,74.93
NetC24_2: C24.2 R22.2 U14.6 Y1.2 | length 18
  Top Layer w0.254: Y1.2 92.531,72.538 U14.6
  Top Layer w0.762: R22.2 C24.2 88.827,68.834 Y1.2
NetC26_2: C26.2 R28.2 U14.46 U16.7 | length 51.4
  Top Layer w0.254: v2(100.457,79.223) 100.968,78.712 U14.46
  Top Layer w0.508: U16.7 67.833,94.691 C26.2 ; v2(67.158,92.939) 67.691,93.472 C26.2 ; R28.2 C26.2
  Bottom Layer w0.508: v2(67.158,92.939) 67.158,92.38 69.317,90.221 81.839,90.221 92.837,79.223 v2(100.457,79.223)
NetC28_2: C28.2 R27.2 U14.45 U16.1 | length 64.4
  Top Layer w0.254: v2(101.143,80.391) 101.468,80.066 U14.45
  Top Layer w0.508: C28.2 R27.2 57.283,100.273 59.868,97.688 U16.1 61.265,95.961 v2(62.179,95.047)
  Bottom Layer w0.508: v2(62.179,95.047) 67.081,95.047 71.069,91.059 82.448,91.059 93.116,80.391 v2(101.143,80.391)
NetC33_2: C33.2 R36.2 U14.22 U17.7 | length 62
  Top Layer w0.254: v2(104.394,65.049) 104.318,65.049 104.242,65.126 104.468,65.352 U14.22
  Top Layer w0.508: v2(115.24,94.742) 115.291,94.691 U17.7 124.043,94.691 C33.2 R36.2
  Bottom Layer w0.508: v2(104.394,65.049) 104.394,80.95 102.489,82.855 99.543,82.855 98.222,84.176 98.222,86.741 98.984,87.503 104.673,87.503 111.912,94.742 v2(115.24,94.742)
NetC35_2: C35.2 R34.2 U14.21 U17.1 | length 49.8
  Top Layer w0.254: v2(103.403,70.536) 103.968,69.972 U14.21
  Top Layer w0.508: R34.2 107.681,96.977 C35.2 107.706,97.155 v2(109.626,97.155) 111.277,97.155 U17.1
  Bottom Layer w0.508: v2(103.403,70.536) 103.403,80.442 102.057,81.788 99.314,81.788 97.231,83.871 97.231,87.224 98.4,88.392 104.14,88.392 109.626,93.878 v2(109.626,97.155)
NetD1_2: D1.2 U14.1 | length 10.3
  Top Layer w0.254: D1.2 92.507,77.749 95.218,75.038 U14.1
NetLED1_1: LED1.1 R18.1 | length 3.6
  Top Layer w0.762: LED1.1 R18.1
NetLED2_1: LED2.1 R17.1 | length 3.7
  Top Layer w0.762: LED2.1 R17.1
NetLED3_1: LED3.1 R20.1 | length 3
  Top Layer w0.508: LED3.1 121.033,85.81 R20.1
NetLED4_1: LED4.1 R21.1 | length 2.9
  Top Layer w0.508: R21.1 115.165,85.735 LED4.1
NetR1_1: R1.1 U1.4 U3.16 | length 20.7
  Top Layer w0.508: R1.1 65.928,58.075 ; U1.4@64.999,51.333 64.999,53.061 66.827,54.889 66.827,57.175 65.928,58.075 ; U3.16 73.457,52.172 67.554,58.075 65.928,58.075
NetR2_1: R2.1 U2.4 U3.14 | length 27
  Top Layer w0.508: v2(59.487,58.014) 59.548,58.075 R2.1 61.239,59.207 61.798,59.766 67.818,59.766 72.873,54.712 U3.14
  Bottom Layer w0.508: U2.4 56.871,55.397 v2(59.487,58.014)
NetR3_1: R3.1 U14.14 | length 10.7
  Top Layer w0.254: R3.1 93.802,64.262 95.047,65.507 99.593,65.507 100.468,66.381 U14.14
NetR3_2: R3.2 U3.1 | length 18.3
  Top Layer w0.508: U3.1 88.036,52.172 93.802,57.937 R3.2
NetR4_1: R4.1 U14.13 | length 12
  Top Layer w0.254: R4.1 91.084,64.618 94.705,68.238 U14.13
NetR4_2: R4.2 U3.3 | length 14.3
  Top Layer w0.508: U3.3 87.452,54.712 91.084,58.344 R4.2
NetR5_1: R5.1 U3.12 U4.4 | length 29
  Top Layer w0.508: U4.4 U4.4@55.728,51.841 ; U4.4@55.728,51.333 U4.4@55.728,51.841 ; U3.12 72.034,57.252 68.682,60.604 58.699,60.604 57.76,59.665 R5.1 56.525,58.075 55.728,57.277 U4.4@55.728,51.841
NetR6_1: R6.1 U3.10 U5.4 | length 32.8
  Top Layer w0.508: R6.1 54.204,60.198 55.474,61.468 69.825,61.468 71.501,59.792 U3.10
  Bottom Layer w0.508: v2@72.238,59.842 72.365,59.715 U5.4
  other v2: 72.314,59.766
NetR7_1: R7.1 U14.12 | length 13.3
  Top Layer w0.254: R7.1 88.443,63.729 94.253,69.538 U14.12
NetR7_2: R7.2 U3.5 | length 9.5
  Top Layer w0.508: U3.5 85.42,57.252 88.443,60.274 R7.2
NetR8_1: R8.1 U14.11 | length 16.1
  Top Layer w0.254: R8.1 85.776,63.551 86.385,64.16 87.503,64.16 93.381,70.038 U14.11
NetR8_2: R8.2 U3.7 | length 5.2
  Top Layer w0.508: U3.7 84.465,59.792 R8.2
NetR9_1: R9.1 U6.4 U8.16 | length 23.2
  Top Layer w0.508: U6.4 105.41,50.216 106.172,49.454 110.388,49.454 112.116,51.181 112.116,52.248 ; R9.1 108.372,57.643 109.779,56.236 109.779,54.178 112.116,51.841 U8.16
NetR10_1: R10.1 U7.4 U8.14 | length 29.1
  Top Layer w0.508: v2(101.448,57.734) 101.539,57.643 R10.1 103.327,58.776 104.013,59.461 108.687,59.461 110.973,57.175 110.973,55.55 112.141,54.381 U8.14
  Bottom Layer w0.508: U7.4 96.342,56.134 97.942,57.734 v2(101.448,57.734)
NetR11_1: R11.1 U14.15 | length 44.2
  Top Layer w0.254: v2(99.568,64.186) 99.67,64.186 100.968,65.484 U14.15
  Top Layer w0.508: v2(128.753,47.447) 128.763,47.457 R11.1
  Bottom Layer w0.508: v2(99.568,64.186) 99.568,61.824 100.863,60.528 114.63,60.528 127.711,47.447 v2(128.753,47.447)
NetR11_2: R11.2 U8.1 | length 6.4
  Top Layer w0.508: U8.1 121.897,51.026 123.495,49.428 R11.2
NetR12_1: R12.1 U14.17 | length 42.8
  Top Layer w0.254: v2(101.854,62.763) 102.413,63.322 102.413,64.745 101.968,65.19 U14.17
  Top Layer w0.508: R12.1 129.548,52.214 v2(130.81,50.952)
  Bottom Layer w0.508: v2(101.854,62.763) 101.854,61.9 102.438,61.316 115.392,61.316 125.755,50.952 v2(130.81,50.952)
NetR12_2: R12.2 U8.3 | length 5.9
  Top Layer w0.508: U8.3 123.723,54.381 125.891,52.214 R12.2
NetR13_1: R13.1 U8.12 U9.4 | length 33.8
  Top Layer w0.508: U9.4@93.98,51.41 U9.4 93.98,56.312 94.971,57.302 94.971,59.487 95.834,60.35 98.552,60.35 99.695,59.207 ; R13.1 99.695,59.207 ; U8.12 113.259,56.921 109.728,60.452 100.94,60.452 99.695,59.207
NetR14_1: R14.1 U8.10 U10.4 | length 28.7
  Top Layer w0.508: R14.1 96.749,58.014 v2(98.019,59.284) ; v2(112.776,59.461) U8.10
  Bottom Layer w0.508: v2(98.019,59.284) v2@112.598,59.284 ; U10.4@111.76,51.054 111.76,58.445 v2@112.598,59.284 ; v2(112.776,59.461) v2@112.598,59.284
NetR15_1: R15.1 U14.16 | length 40.2
  Top Layer w0.254: v2(101.321,64.237) 101.468,64.384 U14.16
  Top Layer w0.508: R15.1 129.303,54.999 v2(130.632,53.67)
  Bottom Layer w0.508: v2(101.321,64.237) 102.565,64.237 104.546,62.255 115.722,62.255 124.308,53.67 v2(130.632,53.67)
NetR15_2: R15.2 U8.5 | length 5.8
  Top Layer w0.508: U8.5 123.673,56.921 125.595,54.999 R15.2
NetR16_1: R16.1 U14.29 | length 37
  Top Layer w0.254: U14.29 112.813,71.538 v2(113.36,72.085)
  Top Layer w0.508: R16.1 129.54,57.785 v2(130.886,56.439)
  Bottom Layer w0.508: v2(113.36,72.085) 113.36,66.04 122.961,56.439 v2(130.886,56.439)
NetR16_2: R16.2 U8.7 | length 5.7
  Top Layer w0.508: U8.7 124.358,59.461 126.035,57.785 R16.2
NetR19_1: R19.1 U14.20 | length 6.3
  Top Layer w0.254: U14.20 103.468,62.801 R19.1
NetR23_2: R23.2 U14.44 | length 5.9
  Top Layer w0.254: U14.44 101.968,82.156 R23.2
NetR24_2: R24.2 U14.7 | length 15.9
  Top Layer w0.254: R24.2 88.189,65.989 94.238,72.038 U14.7
NetR25_2: R25.2 U15.1 | length 4.1
  Top Layer w0.508: R25.2 81.468,97.739 U15.1
NetR29_2: R29.2 U15.3 | length 3.9
  Top Layer w0.508: R29.2 81.189,95.199 U15.3
NetR31_2: R31.2 R32.1 U16.3 U16.6 | length 15.3
  Top Layer w0.508: R31.2 52.791,92.558 R32.1 53.706,93.421 U16.3 U16.6
NetR33_2: R33.2 U15.5 | length 3.9
  Top Layer w0.508: R33.2 81.163,92.659 U15.5
NetR37_2: R37.2 R38.1 U17.3 U17.6 | length 18.6
  Top Layer w0.508: U17.3 U17.6 120.523,93.421 v2(120.548,93.447) ; v2(122.301,88.697) R37.2 124.602,86.03 R38.1
  Bottom Layer w0.508: v2(120.548,93.447) 122.301,91.694 v2(122.301,88.697)
NetR39_2: R39.2 U15.7 | length 4
  Top Layer w0.508: R39.2 81.29,90.119 U15.7
RXD1: JP2.2 U14.31 | length 21.2
  Top Layer w0.254: U14.31 110.537,72.538 v2(110.947,72.949)
  Bottom Layer w0.508: JP2.2 105.791,83.363 106.807,82.347 106.807,73.736 107.594,72.949 v2(110.947,72.949)
S11: C27.2 R26.1 U15.15 U16.2 | length 51
  Top Layer w0.508: C27.2 54.953,97.701 v2(57.15,95.504) 57.963,94.691 U16.2 ; v2(88.671,96.444) 88.697,96.469 U15.15 93.193,96.469 94.742,98.019 R26.1
  Bottom Layer w0.508: v2(57.15,95.504) 57.988,96.342 67.513,96.342 71.907,91.948 83.693,91.948 88.189,96.444 v2(88.671,96.444)
S12: C30.2 R30.2 U15.14 U16.5 | length 44.7
  Top Layer w0.508: v2(65.202,90.729) 65.169,90.761 U16.5 66.414,90.907 C30.2 ; v2(82.093,87.706) 82.804,86.995 87.097,86.995 88.214,88.113 88.214,94.742 88.671,95.199 U15.14 95.087,95.199 R30.2
  Bottom Layer w0.508: v2(65.202,90.729) 66.929,90.729 68.275,89.383 80.416,89.383 v2(82.093,87.706)
S21: C34.2 R35.1 U15.11 U17.2 | length 26.9
  Top Layer w0.508: U15.11 93.944,91.389 R35.1 95.138,91.933 95.86,91.211 103.276,91.211 104.394,90.094 107.213,90.094 107.681,90.561 C34.2 109.118,91.948 109.525,92.354 109.525,93.777 110.439,94.691 U17.2
S22: C37.2 R40.2 U15.10 U17.5 | length 38.2
  Top Layer w0.508: U15.10 94.833,90.119 R40.2 95.164,88.478 95.428,88.214 115.799,88.214 117.773,90.188 U17.5 118.382,91.542 C37.2
SIN11: C25.1 CH6.3 R25.1 | length 29.9
  Top Layer w0.762: CH6.3 59.212,103.068 60.884,101.397 74.803,101.397 78.08,98.12 R25.1
  Bottom Layer w0.762: CH6.3 59.212,102.728 C25.1
SIN12: C31.1 CH7.3 U15.4 | length 26.4
  Top Layer w0.508: v2(82.829,93.929) U15.4
  Bottom Layer w0.508: C31.1 72.126,93.736 73.152,92.71 81.712,92.71 82.829,93.828 v2(82.829,93.929)
  Bottom Layer w0.762: CH7.3 71.099,102.474 C31.1
SIN21: C32.1 CH8.3 R33.1 | length 35.8
  Top Layer w0.508: v2(76.962,93.98) 76.962,93.828 76.937,93.802 78.156,92.583 R33.1
  Bottom Layer w0.508: v2(76.962,93.98) 78.156,95.174 85.242,95.174 91.516,101.448 C32.1
  Bottom Layer w0.762: CH8.3 100.69,102.576 C32.1
SIN22: C38.1 CH9.3 U15.8 | length 42.7
  Top Layer w0.508: U15.8 86.843,88.849 v2(86.995,89.002)
  Bottom Layer w0.508: v2(86.995,89.002) 88.062,89.002 90.678,91.618 90.678,98.577 92.151,100.051 112.131,100.051 C38.1
  Bottom Layer w0.762: CH9.3 112.578,102.398 C38.1
SPEED11: C1.1 CH1.3 U1.5 U1.6 U1.7 U1.8 | length 14.8
  Top Layer w0.762: CH1.3 62.759,44.274 U1.5 U1.6 U1.7 U1.8 70.68,46.514 C1.1
SPEED12: C4.1 CH1.2 U4.5 U4.6 U4.7 U4.8 | length 14.6
  Top Layer w0.762: U4.5 U4.6 U4.7 U4.8 61.155,46.514 ; CH1.2 58.799,44.158 61.155,46.514 ; C4.1 61.155,46.514
SPEED13: C2.1 CH1.1 U2.5 U2.6 U2.7 U2.8 | length 17.3
  Bottom Layer w0.508: CH1.1 54.32,39.421 C2.1 52.332,45.176 U2.8 U2.7 U2.6 U2.5
SPEED21: C6.1 CH3.3 U6.5 U6.6 U6.7 U6.8 | length 16.8
  Top Layer w0.762: CH3.3 101.697,43.531 104.807,46.641 U6.5 U6.6 U6.7 U6.8 112.133,46.641 C6.1
SPEED22: C9.1 CH3.2 U9.5 U9.6 U9.7 U9.8 | length 15
  Top Layer w0.762: U9.5 U9.6 U9.7 U9.8 98.704,46.641 ; CH3.2 97.737,45.674 98.704,46.641 ; C9.1 99.373,47.31 98.704,46.641
SPEED23: C7.1 CH3.1 U7.5 U7.6 U7.7 U7.8 | length 16.9
  Bottom Layer w0.762: CH3.1 88.849,44.348 C7.1 89.111,46.464 U7.8 U7.7 U7.6 U7.5
SWITCH1: U13.8 U14.25 | length 12.9
  Top Layer w0.254: U14.25 117.164,69.538 U13.8
SWITCH2: U13.7 U14.26 | length 17.8
  Top Layer w0.254: U14.26 115.809,70.038 v2(116.738,70.968)
  Top Layer w0.508: U13.7 120.218,68.758 v2(120.244,68.732)
  Bottom Layer w0.508: v2(116.738,70.968) 116.738,70.18 118.186,68.732 v2(120.244,68.732)
SWITCH3: U13.6 U14.27 | length 17.3
  Top Layer w0.254: U14.27 114.836,70.538 117.399,73.101 121.056,73.101 121.488,72.669 U13.6
SWITCH4: U13.5 U14.28 | length 19
  Top Layer w0.254: U14.28 114.066,71.038 116.789,73.762 121.818,73.762 122.758,72.822 U13.5
TCK/SWCLK: JP1.3 U14.37 | length 22.1
  Top Layer w0.254: U14.37 112.66,76.338 115.177,78.855 JP1.3
TMS/SWDIO: JP1.2 U14.34 | length 21.1
  Top Layer w0.254: U14.34 108.735,74.038 110.261,75.565 113.462,75.565 115.252,77.355 JP1.2
TXD1: JP2.3 U14.30 | length 26.6
  Top Layer w0.254: U14.30 111.866,72.038 v2(112.217,72.39)
  Bottom Layer w0.508: JP2.3 103.251,84.049 105.689,81.61 105.689,73.101 107.061,71.73 111.557,71.73 v2(112.217,72.39)
pads on no net: Pad1.1 Pad2.1 Pad3.1 Pad4.1 U11.8 U14.2 U14.3 U14.4 U14.10 U14.18 U14.19 U14.38 U14.39 U14.40 U14.41 U14.42

## Polygon pours and split planes (outlines as drawn)
24V0 on Top Layer "Top Layer-No Net" (hatched 90Degree grid 0.508 track 0.305, remove dead copper, pour order 16): 51.54,109.906 51.801,109.677 136.397,109.677 136.397,101.868 136.831,101.487 136.108,100.851 64.324,100.851 64.324,50.364 66.175,48.736 67.187,47.846 137.236,47.846 137.236,36.095 136.253,35.23 136.021,35.027 53.883,35.027 53.883,35.535 37.889,49.601 34.823,52.297 34.823,94.289 35.894,95.23 52.177,109.55 53.391,109.55
GND on Top Layer "Top Layer-No Net" (hatched 90Degree grid 0.508 track 0.305, remove dead copper, pour order 10): 62.196,100.432 135.882,100.432 136.843,99.593 136.96,99.695 142.52,99.695 142.753,99.695 144.704,97.993 144.704,48.793 62.72,48.793 61.497,47.727 60.274,48.793 60.274,100.736
24V0 on Bottom Layer "Top Layer-No Net" (hatched 90Degree grid 0.508 track 0.305, remove dead copper, pour order 14): 51.566,109.906 134.99,109.906 135.829,109.17 136.957,108.18 136.957,101.05 65.08,101.05 63.517,99.68 65.08,98.31 65.08,79.685 65.08,49.566 64.848,49.363 66.7,47.739 137.16,47.739 137.16,36.372 136.118,35.458 135.829,35.204 55.241,35.204 54.055,35.204 39.616,47.866 34.696,52.18 34.696,52.307 34.696,94.25 38.4,97.498
GND on Bottom Layer "Top Layer-No Net" (hatched 90Degree grid 0.508 track 0.305, remove dead copper, pour order 12): 60.419,100.635 143.439,100.635 144.628,99.593 144.512,99.492 144.512,47.854 61.144,47.854 60.912,48.057 60.071,48.793 60.071,100.101

## Keep-outs
Keep-Out Layer:
  lines w0.2: 34.138,37.16 34.138,107.264 ; 34.138,37.236 ccw(c36.652,37.567) 36.982,35.052 ; 34.163,107.163 cw(c36.678,107.493) 36.347,110.007 36.368,110.028 143.293,110.028 ; 36.728,35.027 144.055,35.027 ; 143.281,110.007 cw(c143.612,107.493) 146.126,107.823 146.126,37.871 ; 143.916,35.001 ccw(c143.586,37.516) 146.101,37.846 ; 146.126,37.389 146.126,38.252

## Silkscreen, mask and mechanical layers (free items; w line width, h text height)
Top Overlay:
  lines w0.2: 127.889,74.431 127.965,74.355
  lines w0.254: 127.889,74.431 127.889,81.839
  text "PNP" at 54.28,106.502 h0.8
  text "NPN" at 82.042,106.502 h0.8
  text "PNP" at 93.345,106.147 h0.8
  text "SENSOR" at 52.095,105.283 h0.8
  text "SENSOR" at 81.839,105.232 h0.8
  text "SENSOR" at 93.32,104.902 h0.8
  text "NPN" at 122.936,102.616 h0.8
  text "SENSOR" at 122.784,101.143 h0.8
  text "+24V" at 66.091,100.305 h0.8
  text "+24V" at 77.724,100.279 h0.8
  text "SIN12" at 69.647,100.203 h0.8
  text "SIN11" at 57.328,100.178 h0.8
  text "24V0" at 73.889,100.178 h0.8
  text "24V0" at 62.001,100.152 h0.8
  text "+24V" at 106.985,100.051 h0.8
  text "SIN22" at 110.871,100.051 h0.8
  text "24V0" at 115.291,100.051 h0.8
  text "SIN21" at 98.628,100 h0.8
  text "+24V" at 119.177,100 h0.8
  text "24V0" at 103.048,99.974 h0.8
  text "TXD" at 101.956,87.579 h0.8
  text "+3V3" at 107.213,87.579 h0.8
  text "GND" at 99.416,87.554 h0.8
  text "RXD" at 104.623,87.554 h0.8
  text "IN" at 45.593,80.594 h0.8 r60
  text "GND" at 121.641,80.239 h0.8
  text "+24V" at 43.942,80.035 h0.8 r60
  text "SCLK" at 121.539,78.715 h0.8
  text "SDIO" at 121.59,77.064 h0.8
  text "+3V3" at 121.539,75.463 h0.8
  text "24V0" at 43.739,75.336 h0.8 r60
  text "+24V" at 43.713,70.993 h0.8 r60
  text "IN" at 45.009,70.79 h0.8 r60
  text "24V0" at 43.383,68.047 h0.8
  text "24V0" at 120.066,44.679 h0.8
  text "+24V" at 115.824,44.628 h0.8
  text "SP23" at 92.38,44.602 h0.8
  text "SP22" at 96.291,44.602 h0.8
  text "SP21" at 100.178,44.602 h0.8
  text "DIR21" at 103.835,44.602 h0.8
  text "24V0" at 108.28,44.577 h0.8
  text "24V0" at 112.141,44.526 h0.8
  text "SP12" at 57.226,44.475 h0.8
  text "+24V" at 76.556,44.475 h0.8
  text "24V0" at 81.559,44.475 h0.8
  text "DIR11" at 64.897,44.425 h0.8
  text "SP13" at 53.188,44.399 h0.8
  text "SP11" at 61.112,44.399 h0.8
  text "24V0" at 69.164,44.399 h0.8
  text "24V0" at 72.949,44.374 h0.8
Bottom Overlay:
  text "Willach Heise" at 79.375,64.643 h0.8
  text "belt_control" at 79.451,63.17 h0.8
  text "2016-11-18" at 79.451,61.646 h0.8

## Text inside footprints (layer, text, board x,y; h text height)
C11: Top Overlay "+" at 45.771,64.872 h0.8
C16: Bottom Overlay "+" at 80.365,70.688 h0.8
C18: Bottom Overlay "+" at 81.89,85.877 h0.8 r90